# Altium PCB LMS.PcbDoc
Units mm, origin at the board's own origin, x right, y up, seen from the top; angles counter-clockwise.
Board outline 30 x 30 mm, 2 copper layers (Top Layer, Bottom Layer); 19 components, 16 nets, 100 pads, 1 vias.
Unrouted connection lines stored in the file: 34.
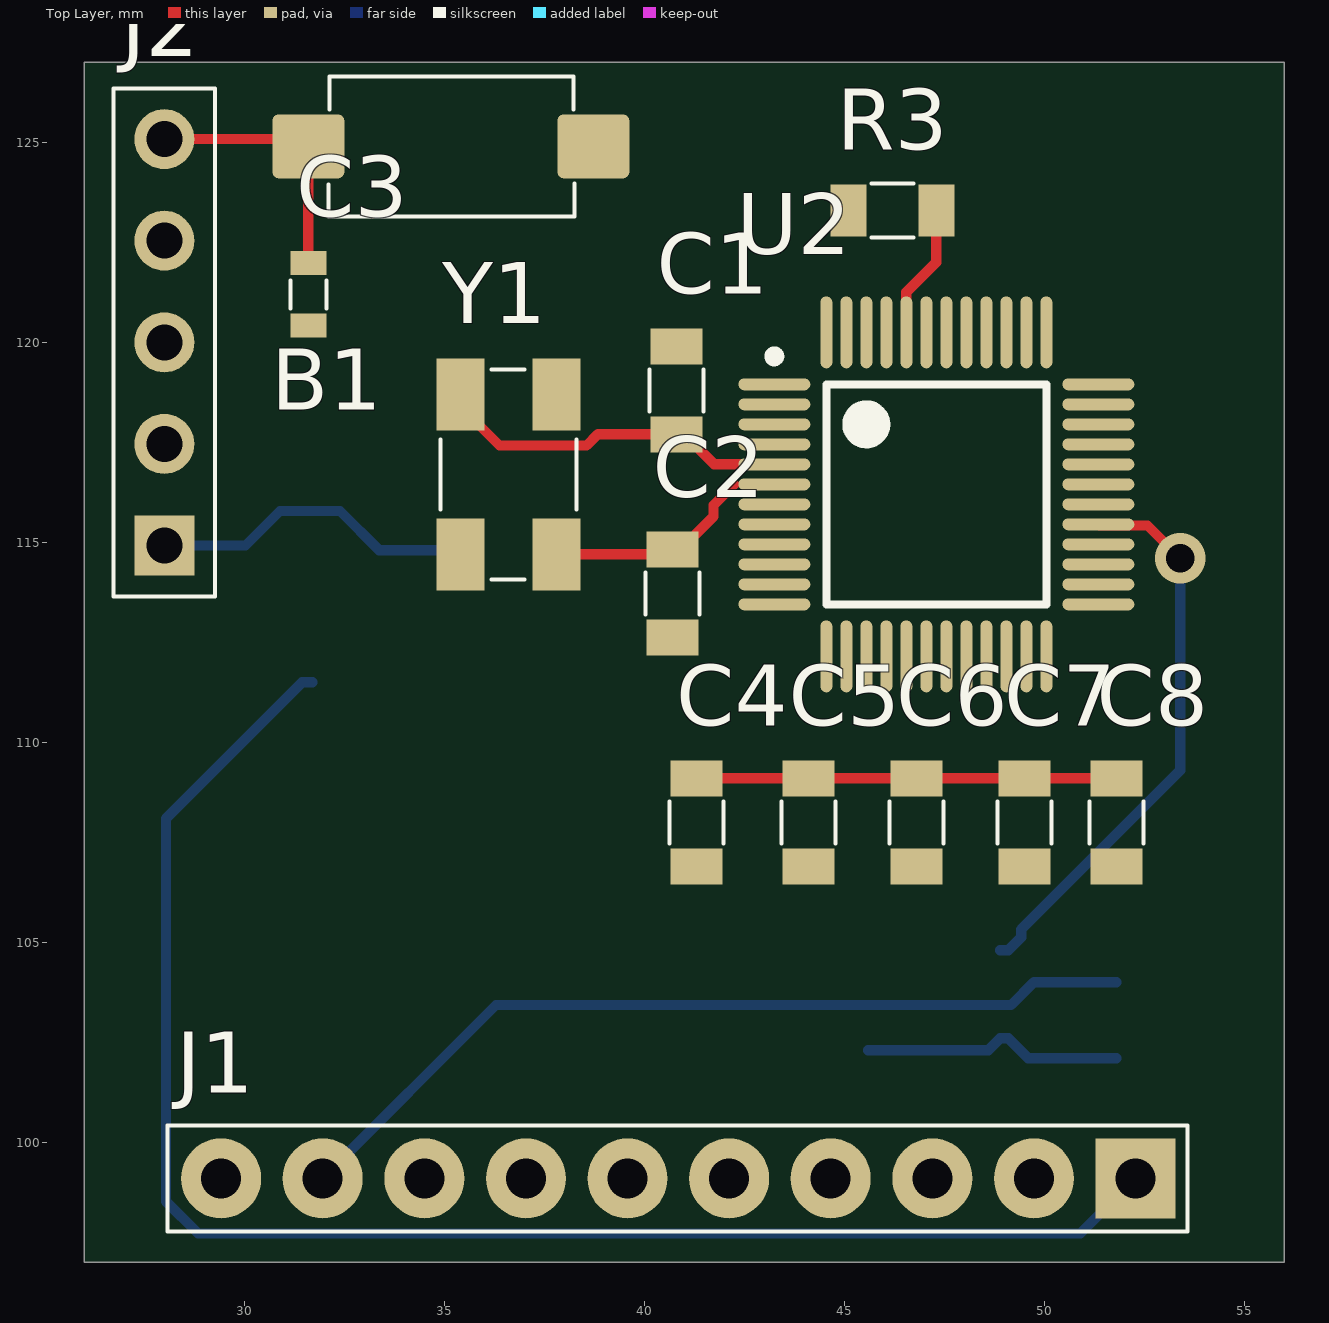
[diagram p0: Top Layer view]
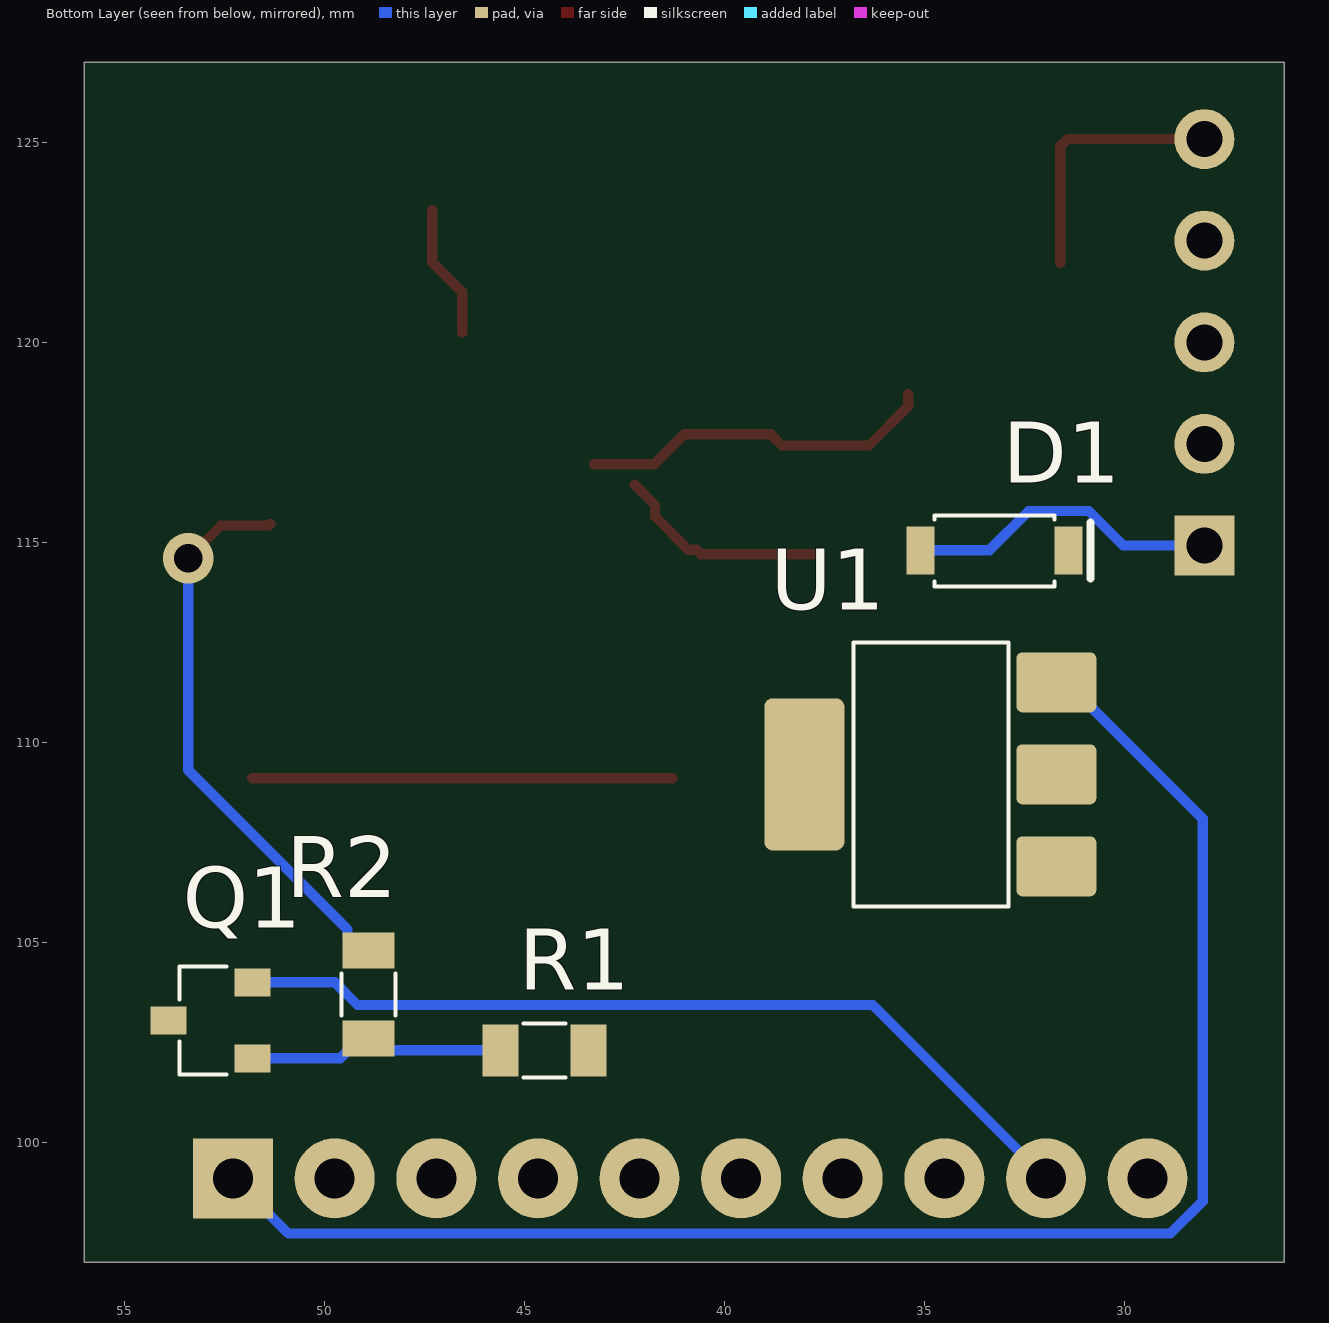
[diagram p1: Bottom Layer view, seen from below]

## Layer stack, top to bottom
Top Solder: solder mask 0.0102, Solder Resist, Dk 3.5
Top Layer: signal copper 0.0356
Dielectric 1: dielectric 0.32, FR-4, Dk 4.8
Bottom Layer: signal copper 0.0356
Bottom Solder: solder mask 0.0102, Solder Resist, Dk 3.5

## Board outline
26,97 56,97 56,127 26,127

## Design rules (kind name [scope] priority, off if disabled: settings)
Clearance [All] p1: gap=0.254 ignorepadtopadclearanceinfootprint=FALSE except(0: Arc-Hole Track-Hole SMDPad-Hole THPad-Hole Via-Hole Fill-Hole Poly-Hole Region-Hole Text-Hole)
PolygonConnect [All] p1: connectstyle=Relief reliefconductorwidth=0.254 reliefentries=4 polygonreliefangle="90 Angle" airgapwidth=0.254
RoomDefinition LMS [InComponentClass('LMS')] p1: confinementstyle=ConfineIn formatcopy=TRUE lockcomponents=FALSE outline 26.176,100.076 117.743,100.076 117.743,122.174 26.176,122.174
RoutingVias [All] p1: holewidth=0.711 width=1.27 viastyle="Through Hole" minholewidth=0.711 minwidth=1.27 maxholewidth=0.711 maxwidth=1.27
SolderMaskExpansion [All] p1: expansion=0.102 istentingtop=FALSE
Width [All] p1: maxlimit=0.254 minlimit=0.254 preferedwidth=0.254
30 further rules are at their usual default settings.

## Classes and differential pairs
component class LMS: B1 C1 C2 C3 C4 C5 C6 C7 C8 D1 J1 J2 Q1 R1 R2 R3 U2 Y1

## Components (designator, comment, footprint, x,y, rotation, side; value= is the part's Value field where it differs from the comment)
B1 "But" "BUTTON 6x3.5" 38.725,124.9 r270 top
C1 "8pF" "0805 Capicator" 40.8,118.8 r270 top
C2 "8pF" "0805 Capicator" 40.7,113.716 r90 top
C3 "0.1uF" "0603 Capicator" 31.6,121.2 r90 top
C4 "0.1uF" "0805 Capicator" 41.3,108 r90 top
C5 "0.1uF" "0805 Capicator" 44.1,108 r90 top
C6 "0.1uF" "0805 Capicator" 46.8,108 r90 top
C7 "0.1uF" "0805 Capicator" 49.5,108 r90 top
C8 "4.7uF" "0805 Capicator" 51.8,108 r90 top
D1 "Diode" sod-123 35.098,114.8 r180 bottom
J1 "PBS 10x1" PBS10 52.28,99.1 r180 top
J2 "Conn 5 (PLS)" "PLS 5x1" 28,114.92 r90 top
Q1 "MOSFET-P" SOT-23 51.8,102.1 r90 bottom
R1 "10k" "0805 Resistor" 44.5,102.3 r180 bottom
R2 "200k" "0805 Resistor" 48.9,103.7 r270 bottom
R3 "3.9k" "0805 Resistor" 46.2,123.3 r0 top
U1 "LDO 3.3V" SOT-223 31.7,109.2 r90 bottom
U2 "STM32F103C6T6" LQFP48_N 47.3,116.2 r0 top
Y1 "32.768kHz" "Crystal ABM" 35.4,114.7 r90 top

## Footprints (in the part's own frame and the unit in brackets; to place one, negate y for a bottom-side part, rotate by r counter-clockwise, add the part's x,y. Pads: shape width x height; smd on the part's side, far side on the other; paste and mask are expansions set on the pad)
"0603 Capicator" [mm]
  rect 0.6x0.9 smd: 1(-0.78,0) 2(0.78,0)
  silkscreen extent -0.35,-0.45 0.35,0.45, body extent -0.82,-0.45 0.88,0.45, height 0.9
"0805 Capicator" [mm]
  rect 0.9x1.3 smd: 1(-1.1,0) 2(1.1,0)
  silkscreen extent -0.53,-0.67 0.53,0.67, body extent -1.05,-0.67 1.05,0.68, height 0.75
"0805 Resistor" [mm]
  rect 0.9x1.3 smd: 1(-1.1,0) 2(1.1,0)
  silkscreen extent -0.53,-0.67 0.53,0.67, body extent -1.05,-0.67 1.05,0.68, height 0.6
"BUTTON 6x3.5" [mm]
  rrect20% 1.6x1.8 smd: 1(0,0) 2(0,-7.125)
  silkscreen extent -1.75,-6.63 1.75,-0.48, body extent -1.75,-7.52 1.75,0.48, height 4.3
"Crystal ABM" [mm]
  rect 1.8x1.2 smd: 1(0,-2.4) 2(4,0) GND(0,0) GND(4,-2.4)
  silkscreen extent -0.63,-2.9 4.62,0.5, body extent -0.5,-2.8 4.5,0.4, height 1.1
LQFP48_N [mm] "Thin QFP, 48-Leads, Body 7x7mm, Pitch 0.5mm, IPC Medium Density"
  oval 1.8x0.3 smd: 1(-4.05,2.75) 2(-4.05,2.25) 3(-4.05,1.75) 4(-4.05,1.25) 5(-4.05,0.75) 6(-4.05,0.25) 7(-4.05,-0.25) 8(-4.05,-0.75) 9(-4.05,-1.25) 10(-4.05,-1.75) 11(-4.05,-2.25) 12(-4.05,-2.75) 25(4.05,-2.75) 26(4.05,-2.25) 27(4.05,-1.75) 28(4.05,-1.25) 29(4.05,-0.75) 30(4.05,-0.25) 31(4.05,0.25) 32(4.05,0.75) 33(4.05,1.25) 34(4.05,1.75) 35(4.05,2.25) 36(4.05,2.75)
  oval 0.3x1.8 smd: 13(-2.75,-4.05) 14(-2.25,-4.05) 15(-1.75,-4.05) 16(-1.25,-4.05) 17(-0.75,-4.05) 18(-0.25,-4.05) 19(0.25,-4.05) 20(0.75,-4.05) 21(1.25,-4.05) 22(1.75,-4.05) 23(2.25,-4.05) 24(2.75,-4.05) 37(2.75,4.05) 38(2.25,4.05) 39(1.75,4.05) 40(1.25,4.05) 41(0.75,4.05) 42(0.25,4.05) 43(-0.25,4.05) 44(-0.75,4.05) 45(-1.25,4.05) 46(-1.75,4.05) 47(-2.25,4.05) 48(-2.75,4.05)
  silkscreen extent -4.17,-2.75 2.75,3.57, body extent -3.5,-3.5 3.5,3.5, height 1.6
PBS10 [mm]
  rect 2x2 hole 1: 1(0,0)
  round 2 hole 1: 2(2.54,0) 3(5.08,0) 4(7.62,0) 5(10.16,0) 6(12.7,0) 7(15.24,0) 8(17.78,0) 9(20.32,0) 10(22.86,0)
  silkscreen extent -1.3,-1.33 24.2,1.33, body extent -1.25,-1.27 24.15,1.27, height 8.4
"PLS 5x1" [mm] "Connector; Header; 5 Position"
  rect 1.5x1.5 hole 0.9: 1(0,0)
  round 1.5 hole 0.9: 2(2.54,0) 3(5.08,0) 4(7.62,0) 5(10.16,0)
  silkscreen extent -1.27,-1.27 11.43,1.27, body extent -1.28,-1.28 11.42,1.26, height 8.54
sod-123 [mm]
  rect 0.7x1.2 smd: 1(0,0) 2(3.7,0)
  silkscreen extent 0.35,-0.9 4.25,0.87, body extent 0,-0.8 3.7,0.8
SOT-23 [mm]
  rect 0.7x0.9 smd: 1(0,0) 2(1.9,0) 3(0.95,2.1)
  silkscreen extent -0.4,0.65 2.3,1.83, body extent -0.55,-0.18 2.45,2.22, height 1.1
SOT-223 [mm]
  rrect20% 1.5x2 smd: 1(-2.3,0) 2(0,0) 3(2.3,0)
  rrect20% 3.8x2 smd: 2(0,6.3)
  silkscreen extent -3.3,1.2 3.3,5.07, body extent -3.25,-0.23 3.25,6.73, height 1.7

## Part data
B1: library part "Button 2 Conn", "Button 2 Conn SMD", Manufacturer="KLS electronic co ltd", Part Number=L-KLS7-TS3608-5.0-180, ComponentLink1Description=Chip&Dip, ComponentLink1URL=https://www.chipdip.ru/product/kls7-ts3608-5.0-180-td-02xa, Type=Button
C1 C2: library part "Cap 8pF (0805)_1", "8pF NPO 50V, 5%, 0805", Manufacturer="Murata Manufacturing", Part Number=MLCC8.0pFNPO50V5%0805, ComponentLink1Description=Chip&Dip, ComponentLink1URL=https://www.chipdip.ru/product0/180505270, Type=Capacitor
C3: library part "Cap 0.1uF (0603)", "0.1uF X7R 16V 10% 0603", Manufacturer="Murata Manufacturing", Part Number=GRM188R71C104KA01D, ComponentLink1Description=Chip&Dip, ComponentLink1URL=https://www.chipdip.ru/product/grm188r71c104ka01d, Type=Capacitor
C4 C5 C6 C7: library part "Cap 0.1uF (0805)", "0.1uF X7R 25V 10% 0805", Manufacturer="Murata Manufacturing", Part Number=GRM21BR71E104KA01L, ComponentLink1Description=Chip&Dip, ComponentLink1URL=https://www.chipdip.ru/product/grm21br71e104ka01l, Type=Capacitor
C8: library part "Cap 4.7uF (0805)", "4.7uF X5R 10% 25V 0805", Manufacturer="Murata Manufacturing", Part Number=GRM21BR61E475KA12L, ComponentLink1Description=Chip&Dip, ComponentLink1URL=https://www.chipdip.ru/product/grm21br61e475ka12l, Type=Capacitor
D1: library part "Diode Schottky (SOD-123)", "0.5 A, Low Forward Voltage less than 385 mV, 400 mW Power Dissipation Package", Manufacturer="ON Semiconductor", Part Number=MBR0520L, ComponentLink1Description=DataSheet, ComponentLink1URL=http://www.farnell.com/datasheets/1875336.pdf, ComponentLink2Description=Chip&Dip, ComponentLink2URL=https://www.chipdip.ru/product/mbr0520l, Type=Diode
J1: library part "Conn 10 (PBS)", "Female", Manufacturer="Ningbo connfly electronic", Part Number=DS1023-1*10S21, ComponentLink1Description=Chip&Dip, ComponentLink1URL=https://www.chipdip.ru/product/pbs-10, Type=Connector
J2: "Header, 5-Pin"
Q1: library part "MOSFET-P [IRLML]", "P-Channel Power MOSFET 12V to 20V, Infineon", Manufacturer="Infineon Technologies", Part Number=IRLML2246TRPBF, ComponentLink1Description=Chip&Dip, ComponentLink1URL=https://www.chipdip.ru/product/irlml2246trpbf, ComponentLink2Description=DataSheet, ComponentLink2URL=http://www.farnell.com/datasheets/1911921.pdf, Type=Transistor
R1: library part "Res 10k (0805)", "0.125W 0805 10k, 1%", Manufacturer=Taiwan, Part Number=RC0805FR-0710KL, ComponentLink1Description=Chip&Dip, ComponentLink1URL=https://www.chipdip.ru/product0/9000079514, Type=Resistor
R2: library part "Res 200k (0805)", "0.125W 0805 200k, 1%", Manufacturer=Taiwan, Part Number=RC0805FK-07200KL, ComponentLink1Description=Chip&Dip, ComponentLink1URL=https://www.chipdip.ru/product0/914213016, Type=Resistor
R3: library part "Res 3.9k (0805)", "0.125W 0805 3.9k, 1%", Manufacturer=Taiwan, Part Number=RC0805FR-073K9L, ComponentLink1Description=Chip&Dip, ComponentLink1URL=https://www.chipdip.ru/product0/9000079500, Type=Resistor
U1: library part "LDO 3.3V [LD]", "LDO Regulator Pos 3.3V 1.3A 4-Pin(3+Tab) SOT-223 T/R", Manufacturer=STMicroelectronics, Part Number=LD1117S33CTR, ComponentLink1Description=DataSheet, ComponentLink1URL=https://static.chipdip.ru/lib/292/DOC000292513.pdf, ComponentLink2Description=Chip&Dip, ComponentLink2URL=https://www.chipdip.ru/product/ld1117s33ctr-2
U2: "STM32 ARM-based 32-bit MCU with 32 Kbytes Flash, 48-pin LQFP, Industrial Temperature", ComponentLink1Description="Manufacturer Link", ComponentLink1URL=www.st.com/stm32, ComponentLink2Description=Datasheet, ComponentLink2URL=http://www.st.com/stonline/products/literature/ds/13587.pdf, DatasheetVersion="rev6, Mar-2008", PackageDescription="48-Pin Low-Profile Quad Flat Pack, 7 x 7 mm Body, 0.5 mm Pitch (LQFP48)", PackageReference=LQFP48, PackageVersion=Mar-2008, Published=30-May-2008, Publisher="Altium Limited"
Y1: library part "Crystal 32.768kHz", "32.768kHz, SMD, 6 pF", Manufacturer=Seiko, Part Number=9000417960, ComponentLink1Description=Chip&Dip, ComponentLink1URL=https://www.chipdip.ru/product/32.768-khz-smd-8mmx3.8mm-6-pf, Type=Crystal

## Via types
v1: diameter 1.27, hole 0.711, Top Layer to Bottom Layer, 1 vias

## Nets (pads, with @x,y where several pads share a name; then routed paths per layer and width w, separated by ;. In a path a pad name is that pad's centre, name@x,y a point inside that pad or via, vN(x,y) a via of type N, cw(c..) or ccw(c..) an arc to the next point about the centre after c; other vN are vias at no path point)
+3.3V: C4.2 C5.2 C6.2 C7.2 C8.2 D1.2 J1.3 Q1.3 R1.2 U1.2 U2.9 U2.24 U2.36 U2.48 | length 10.5
  Top Layer w0.254: C4.2 C5.2 C6.2 C7.2 C8.2
+7.4V: J1.1 J1.7 U1.3 | length 39.8
  Bottom Layer w0.254: U1.3 31.45,111.5 28.039,108.089 28.039,98.528 28.848,97.719 50.899,97.719 J1.1
GND: B1.1 C1.1 C2.1 C3.1 C4.1 C5.1 C6.1 C7.1 C8.1 J1.2 J1.6 J1.10 J2.3 R3.1 U1.1 U2.8 U2.23 U2.35 U2.47
NetC1_2: C1.2 U2.5 Y1.2 | length 9
  Top Layer w0.254: Y1.2 35.4,118.4 36.381,117.419 38.558,117.419 38.839,117.7 C1.2 41,117.7 41.75,116.95 U2.5
NetC2_2: C2.2 U2.6 Y1.1 | length 5.3
  Top Layer w0.254: Y1.1 40.584,114.7 C2.2 40.9,114.816 41.732,115.648 41.732,115.933 42.241,116.442 42.249,116.442
NetD1_1: D1.1 J2.1 | length 7.9
  Bottom Layer w0.254: J2.1 30.03,114.92 30.891,115.781 32.392,115.781 33.373,114.8 D1.1
NetQ1_1: Q1.1 R1.1 R2.2 | length 6.5
  Bottom Layer w0.254: R1.1 48.6,102.3 R2.2 49.1,102.6 49.6,102.1 Q1.1
NetR3_2: R3.2 U2.44 | length 3.4
  Top Layer w0.254: U2.44 46.55,121.251 47.3,122.001 R3.2
NRST: B1.2 C3.2 J2.5 | length 6.6
  Top Layer w0.254: J2.5 31.42,125.08 B1.2 C3.2
servo_contorl: R2.1 U2.29 | length 14.2
  Top Layer w0.254: U2.29 51.381,115.419 52.581,115.419 v1(53.4,114.6)
  Bottom Layer w0.254: R2.1 49.1,104.8 49.423,105.123 49.423,105.323 53.4,109.3 v1(53.4,114.6)
servo_contorl_PDM: J1.9 Q1.2 | length 21.9
  Bottom Layer w0.254: J1.9 36.291,103.431 49.17,103.431 49.739,104 Q1.2
servo_feedback: J1.8 U2.16
SWCLK: J2.2 U2.37
SWDIO: J2.4 U2.34
USART_to_PC_RX: J1.5 U2.31
USART_to_PC_TX: J1.4 U2.30
pads on no net: U2.1 U2.2 U2.3 U2.4 U2.7 U2.10 U2.11 U2.12 U2.13 U2.14 U2.15 U2.17 U2.18 U2.19 U2.20 U2.21 U2.22 U2.25 U2.26 U2.27 U2.28 U2.32 U2.33 U2.38 U2.39 U2.40 U2.41 U2.42 U2.43 U2.45 U2.46 Y1.GND